# Altium PCB Trackpad.PcbDoc (part 3 of 3)
Units mm, origin at the board's own origin, x right, y up, seen from the top; angles counter-clockwise.
Board outline 170 x 125 mm, 6 copper layers (Top Layer, Inner 1, Inner 2, Inner 3, Inner 4, Bottom Layer), stack 1.58 mm thick; 124 components, 120 nets, 488 pads, 1566 vias.
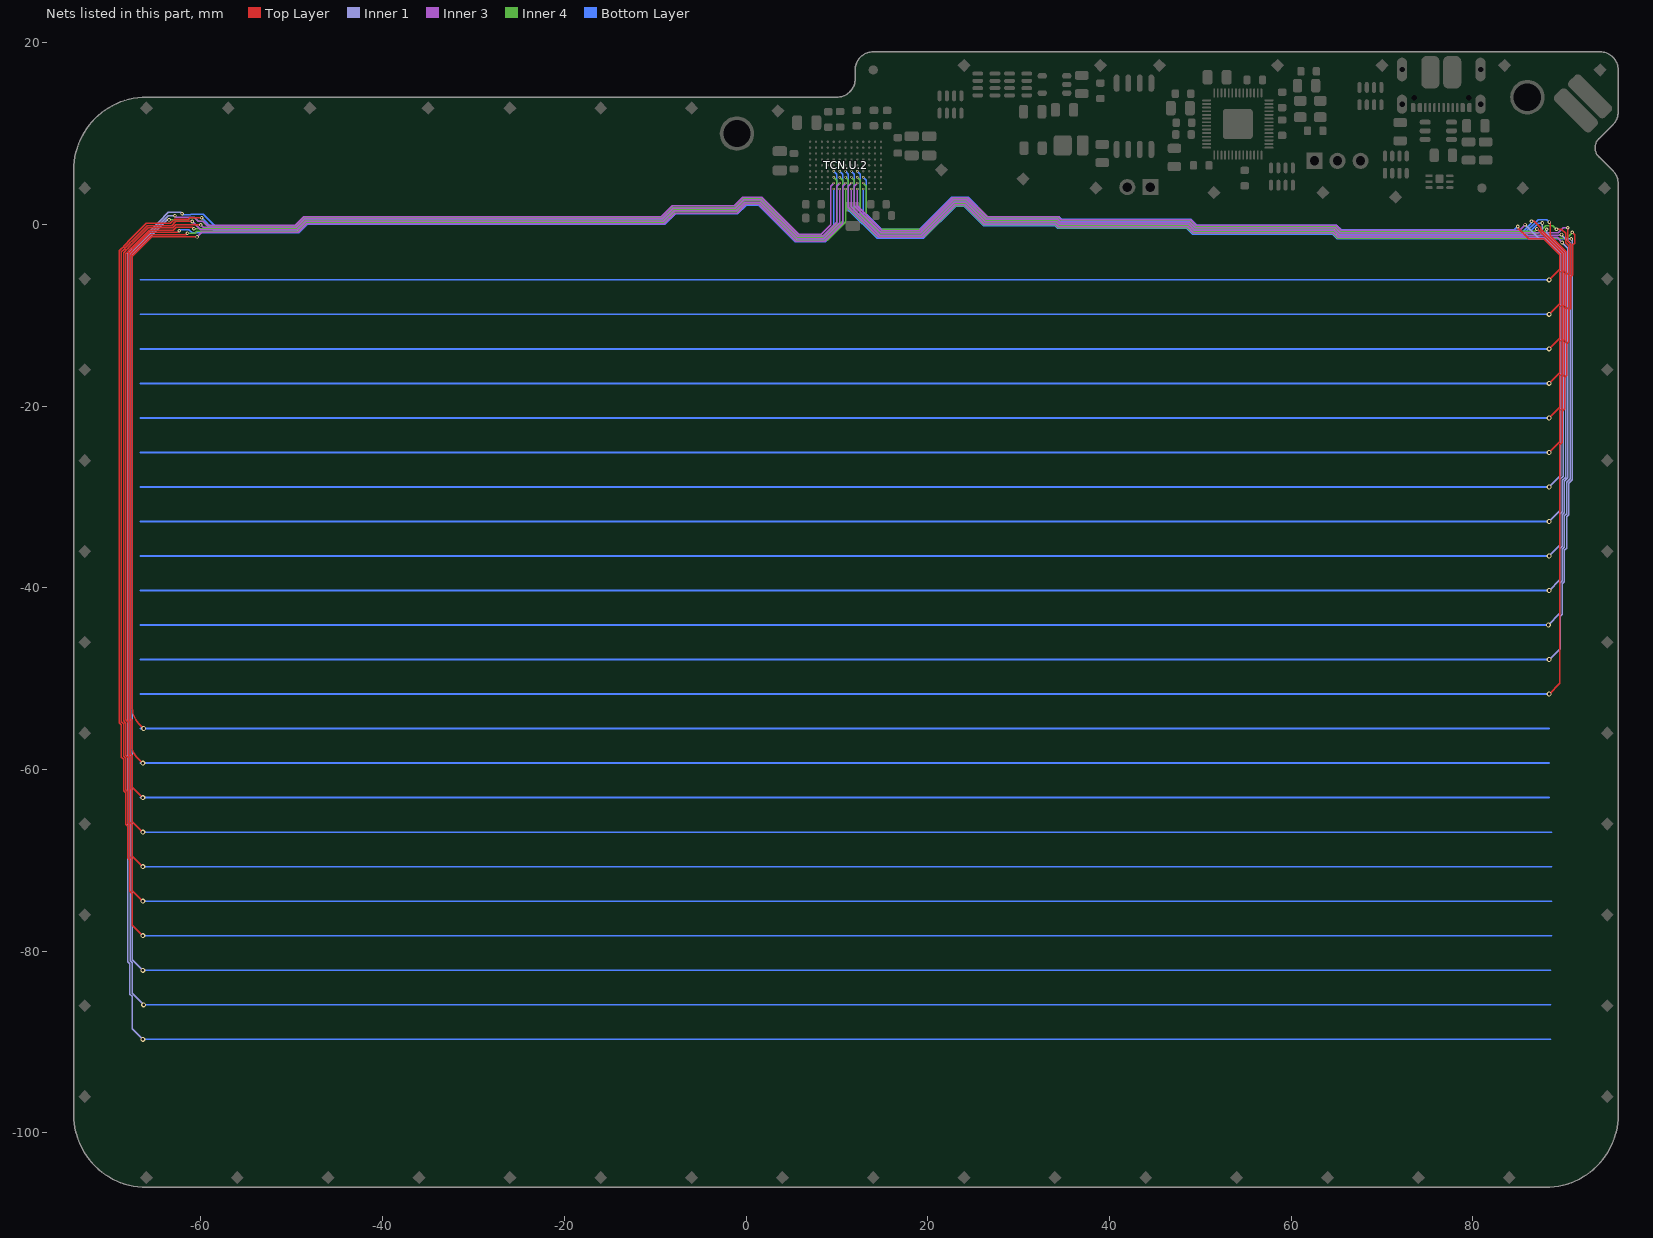
[diagram p7: the nets of this part, all layers, seen from the top]

## Via types
v1: diameter 0.8, hole 0.4, Top Layer to Bottom Layer, tented both sides, 1109 vias
v2: diameter 0.4, hole 0.2, Top Layer to Bottom Layer, tented both sides, 131 vias
v3: diameter 0.55, hole 0.3, Top Layer to Bottom Layer, tented both sides, 97 vias
v4: diameter 0.25, hole 0.15, Top Layer to Bottom Layer, tented both sides, 74 vias
v5: diameter 1.016, hole 0.508, Top Layer to Bottom Layer, tented both sides, 60 vias
v6: diameter 0.45, hole 0.3, Top Layer to Bottom Layer, tented both sides, 37 vias
v7: diameter 0.35, hole 0.2, Top Layer to Bottom Layer, tented both sides, 31 vias
v8: diameter 0.7, hole 0.4, Top Layer to Bottom Layer, tented both sides, 22 vias
v9: diameter 0.6, hole 0.3, Top Layer to Bottom Layer, tented both sides, 3 vias
v10: diameter 0.7, hole 0.3, Top Layer to Bottom Layer, tented both sides, 2 vias

## Nets (pads, with @x,y where several pads share a name; then routed paths per layer and width w, separated by ;. In a path a pad name is that pad's centre, name@x,y a point inside that pad or via, vN(x,y) a via of type N, cw(c..) or ccw(c..) an arc to the next point about the centre after c; other vN are vias at no path point) (continued)
Y3: TCN.U.2.A9 | length 358.9
  Inner 1 w0.15: v3(-66.4,-89.7) -67.575,-88.525 -67.575,-84.979 -67.825,-84.729 -67.825,-81.382 -68.05,-81.157 -68.05,-3.141 -64.609,0.3 -63.584,1.325 -62.225,1.325 v2(-62.075,1.175)
  Bottom Layer w0.15: v2(-62.075,1.175) -61.975,1.075 -61.15,1.075 -61.1,1.125 -59.75,1.125 -59.65,1.025 -58.2,-0.425 -49.475,-0.425 -48.537,0.513 -9.162,0.513 -7.988,1.687 -1.163,1.687 -0.212,2.638 1.587,2.638 5.65,-1.425 8.5,-1.425 9.65,-0.275 v4(9.65,3.9)
  Bottom Layer w0.2: v3@-66.5,-89.7 88.55,-89.7 ; -65.4,-89.7 -64.7,-89.7 ; -61.6,-89.7 -60.9,-89.7 ; -57.8,-89.7 -57.1,-89.7 ; -54,-89.7 -53.3,-89.7 ; -50.2,-89.7 -49.5,-89.7 ; -46.4,-89.7 -45.7,-89.7 ; -42.6,-89.7 -41.9,-89.7 ; -38.8,-89.7 -38.1,-89.7 ; -35,-89.7 -34.3,-89.7 ; -31.2,-89.7 -30.5,-89.7 ; -27.4,-89.7 -26.7,-89.7 ; -23.6,-89.7 -22.9,-89.7 ; -19.8,-89.7 -19.1,-89.7 ; -16,-89.7 -15.3,-89.7 ; -12.2,-89.7 -11.5,-89.7 ; -8.4,-89.7 -7.7,-89.7 ; -4.6,-89.7 -3.9,-89.7 ; -0.8,-89.7 -0.1,-89.7 ; 3,-89.7 3.7,-89.7 ; 6.8,-89.7 7.5,-89.7 ; 10.6,-89.7 11.3,-89.7 ; 14.4,-89.7 15.1,-89.7 ; 18.2,-89.7 18.9,-89.7 ; 22,-89.7 22.7,-89.7 ; 25.8,-89.7 26.5,-89.7 ; 29.6,-89.7 30.3,-89.7 ; 33.4,-89.7 34.1,-89.7 ; 37.2,-89.7 37.9,-89.7 ; 41,-89.7 41.7,-89.7 ; 44.8,-89.7 45.5,-89.7 ; 48.6,-89.7 49.3,-89.7 ; 52.4,-89.7 53.1,-89.7 ; 56.2,-89.7 56.9,-89.7 ; 60,-89.7 60.7,-89.7 ; 63.8,-89.7 64.5,-89.7 ; 67.6,-89.7 68.3,-89.7 ; 71.4,-89.7 72.1,-89.7 ; 75.2,-89.7 75.9,-89.7 ; 79,-89.7 79.7,-89.7 ; 82.8,-89.7 83.5,-89.7 ; 86.6,-89.7 87.3,-89.7
Y4: TCN.U.2.B9 | length 354.5
  Inner 3 w0.15: v2@-62.85,0.95 -62.7,0.8 -60.725,0.8 -60.275,0.35 -59.75,0.35 -59.4,0 ; -59.475,0.075 -59.329,-0.071 -49.621,-0.071 -48.684,0.866 -9.309,0.866 -8.135,2.04 -1.31,2.04 -0.359,2.991 1.734,2.991 5.8,-1.075 8.3,-1.075 9.325,-0.05 9.325,4.225 v4(9.65,4.55)
  Inner 1 w0.15: v3(-66.3,-85.9) -67.575,-84.625 -67.575,-81.279 -67.8,-81.054 -67.8,-3.245 -63.805,0.75 -63.605,0.95 v2(-62.875,0.95)
  Bottom Layer w0.2: v3@-66.5,-85.9 88.55,-85.9 ; -65.4,-85.9 -64.7,-85.9 ; -61.6,-85.9 -60.9,-85.9 ; -57.8,-85.9 -57.1,-85.9 ; -54,-85.9 -53.3,-85.9 ; -50.2,-85.9 -49.5,-85.9 ; -46.4,-85.9 -45.7,-85.9 ; -42.6,-85.9 -41.9,-85.9 ; -38.8,-85.9 -38.1,-85.9 ; -35,-85.9 -34.3,-85.9 ; -31.2,-85.9 -30.5,-85.9 ; -27.4,-85.9 -26.7,-85.9 ; -23.6,-85.9 -22.9,-85.9 ; -19.8,-85.9 -19.1,-85.9 ; -16,-85.9 -15.3,-85.9 ; -12.2,-85.9 -11.5,-85.9 ; -8.4,-85.9 -7.7,-85.9 ; -4.6,-85.9 -3.9,-85.9 ; -0.8,-85.9 -0.1,-85.9 ; 3,-85.9 3.7,-85.9 ; 6.8,-85.9 7.5,-85.9 ; 10.6,-85.9 11.3,-85.9 ; 14.4,-85.9 15.1,-85.9 ; 18.2,-85.9 18.9,-85.9 ; 22,-85.9 22.7,-85.9 ; 25.8,-85.9 26.5,-85.9 ; 29.6,-85.9 30.3,-85.9 ; 33.4,-85.9 34.1,-85.9 ; 37.2,-85.9 37.9,-85.9 ; 41,-85.9 41.7,-85.9 ; 44.8,-85.9 45.5,-85.9 ; 48.6,-85.9 49.3,-85.9 ; 52.4,-85.9 53.1,-85.9 ; 56.2,-85.9 56.9,-85.9 ; 60,-85.9 60.7,-85.9 ; 63.8,-85.9 64.5,-85.9 ; 67.6,-85.9 68.3,-85.9 ; 71.4,-85.9 72.1,-85.9 ; 75.2,-85.9 75.9,-85.9 ; 79,-85.9 79.7,-85.9 ; 82.8,-85.9 83.5,-85.9 ; 86.6,-85.9 87.3,-85.9
Y5: TCN.U.2.C9 | length 351.3
  Inner 4 w0.15: v2(-63.525,0.5) -61.375,0.5 -61.15,0.725 -60.7,0.725 -60.325,0.35 -59.8,0.35 -59.237,-0.213 -49.563,-0.213 -48.625,0.725 -9.25,0.725 -8.076,1.899 -1.251,1.899 -0.3,2.85 1.675,2.85 5.75,-1.225 8.7,-1.225 9.975,0.05 9.975,4.875 v4(9.65,5.2)
  Inner 1 w0.15: v3(-66.4,-82.1) -67.55,-80.95 -67.55,-3.348 -63.702,0.5 v2(-63.525,0.5)
  Bottom Layer w0.2: v3@-66.5,-82.1 88.55,-82.1 ; -65.4,-82.1 -64.7,-82.1 ; -61.6,-82.1 -60.9,-82.1 ; -57.8,-82.1 -57.1,-82.1 ; -54,-82.1 -53.3,-82.1 ; -50.2,-82.1 -49.5,-82.1 ; -46.4,-82.1 -45.7,-82.1 ; -42.6,-82.1 -41.9,-82.1 ; -38.8,-82.1 -38.1,-82.1 ; -35,-82.1 -34.3,-82.1 ; -31.2,-82.1 -30.5,-82.1 ; -27.4,-82.1 -26.7,-82.1 ; -23.6,-82.1 -22.9,-82.1 ; -19.8,-82.1 -19.1,-82.1 ; -16,-82.1 -15.3,-82.1 ; -12.2,-82.1 -11.5,-82.1 ; -8.4,-82.1 -7.7,-82.1 ; -4.6,-82.1 -3.9,-82.1 ; -0.8,-82.1 -0.1,-82.1 ; 3,-82.1 3.7,-82.1 ; 6.8,-82.1 7.5,-82.1 ; 10.6,-82.1 11.3,-82.1 ; 14.4,-82.1 15.1,-82.1 ; 18.2,-82.1 18.9,-82.1 ; 22,-82.1 22.7,-82.1 ; 25.8,-82.1 26.5,-82.1 ; 29.6,-82.1 30.3,-82.1 ; 33.4,-82.1 34.1,-82.1 ; 37.2,-82.1 37.9,-82.1 ; 41,-82.1 41.7,-82.1 ; 44.8,-82.1 45.5,-82.1 ; 48.6,-82.1 49.3,-82.1 ; 52.4,-82.1 53.1,-82.1 ; 56.2,-82.1 56.9,-82.1 ; 60,-82.1 60.7,-82.1 ; 63.8,-82.1 64.5,-82.1 ; 67.6,-82.1 68.3,-82.1 ; 71.4,-82.1 72.1,-82.1 ; 75.2,-82.1 75.9,-82.1 ; 79,-82.1 79.7,-82.1 ; 82.8,-82.1 83.5,-82.1 ; 86.6,-82.1 87.3,-82.1
Y6: TCN.U.2.D9 | length 351.1
  Top Layer w0.15: v3(-66.4,-78.3) -67.55,-77.15 -67.55,-73.689 -67.815,-73.424 -67.815,-69.964 -68.055,-69.724 -68.055,-66.263 -68.295,-66.023 -68.295,-62.563 -68.51,-62.348 -68.51,-58.887 -68.75,-58.647 -68.75,-55.086 -68.99,-54.846 -68.99,-53.865 -68.99,-2.929 -68.75,-2.689 -68.75,-2.674 -68.51,-2.434 -68.51,-2.42 -68.295,-2.205 -68.295,-2.191 -68.055,-1.951 -68.055,-1.937 -67.815,-1.697 -67.815,-1.683 -67.55,-1.418 -67.55,-1.404 -66.026,0.12 -63.355,0.12 -62.9,0.575 -61.4,0.575 -61.25,0.725 v2(-59.925,0.725)
  Bottom Layer w0.15: v2(-59.925,0.725) -58.528,-0.672 -49.372,-0.672 -48.435,0.265 -9.06,0.265 -7.886,1.439 -1.061,1.439 -0.11,2.39 1.485,2.39 5.55,-1.675 8.6,-1.675 9.975,-0.3 9.975,5.525 v4(9.65,5.85)
  Bottom Layer w0.2: v3(-66.4,-78.3) 88.65,-78.3 ; -65.4,-78.3 -64.7,-78.3 ; -61.6,-78.3 -60.9,-78.3 ; -57.8,-78.3 -57.1,-78.3 ; -54,-78.3 -53.3,-78.3 ; -50.2,-78.3 -49.5,-78.3 ; -46.4,-78.3 -45.7,-78.3 ; -42.6,-78.3 -41.9,-78.3 ; -38.8,-78.3 -38.1,-78.3 ; -35,-78.3 -34.3,-78.3 ; -31.2,-78.3 -30.5,-78.3 ; -27.4,-78.3 -26.7,-78.3 ; -23.6,-78.3 -22.9,-78.3 ; -19.8,-78.3 -19.1,-78.3 ; -16,-78.3 -15.3,-78.3 ; -12.2,-78.3 -11.5,-78.3 ; -8.4,-78.3 -7.7,-78.3 ; -4.6,-78.3 -3.9,-78.3 ; -0.8,-78.3 -0.1,-78.3 ; 3,-78.3 3.7,-78.3 ; 6.8,-78.3 7.5,-78.3 ; 10.6,-78.3 11.3,-78.3 ; 14.4,-78.3 15.1,-78.3 ; 18.2,-78.3 18.9,-78.3 ; 22,-78.3 22.7,-78.3 ; 25.8,-78.3 26.5,-78.3 ; 29.6,-78.3 30.3,-78.3 ; 33.4,-78.3 34.1,-78.3 ; 37.2,-78.3 37.9,-78.3 ; 41,-78.3 41.7,-78.3 ; 44.8,-78.3 45.5,-78.3 ; 48.6,-78.3 49.3,-78.3 ; 52.4,-78.3 53.1,-78.3 ; 56.2,-78.3 56.9,-78.3 ; 60,-78.3 60.7,-78.3 ; 63.8,-78.3 64.5,-78.3 ; 67.6,-78.3 68.3,-78.3 ; 71.4,-78.3 72.1,-78.3 ; 75.2,-78.3 75.9,-78.3 ; 79,-78.3 79.7,-78.3 ; 82.8,-78.3 83.5,-78.3 ; 86.6,-78.3 87.3,-78.3
Y7: TCN.U.2.A8 | length 344.5
  Top Layer w0.15: v3(-66.4,-74.5) -67.575,-73.325 -67.575,-69.864 -67.815,-69.624 -67.815,-66.164 -68.055,-65.924 -68.055,-62.463 -68.27,-62.248 -68.27,-58.788 -68.51,-58.548 -68.51,-54.987 -68.75,-54.747 -68.75,-53.766 -68.75,-3.028 -68.51,-2.788 -68.51,-2.774 -68.27,-2.534 -68.27,-2.52 -68.2,-2.45 -68.055,-2.305 -68.055,-2.291 -67.815,-2.051 -67.815,-2.036 -67.575,-1.796 -67.575,-1.782 -65.923,-0.13 -63.23,-0.13 -62.775,0.325 v2(-60.95,0.325)
  Inner 3 w0.15: v2(-60.95,0.325) -60.023,-0.602 -49.402,-0.602 -48.464,0.336 -9.089,0.336 -7.915,1.51 -1.09,1.51 -0.139,2.461 1.514,2.461 5.575,-1.6 8.525,-1.6 10.3,0.175 v4(10.3,3.9)
  Bottom Layer w0.2: v3(-66.4,-74.5) 88.65,-74.5 ; -65.4,-74.5 -64.7,-74.5 ; -61.6,-74.5 -60.9,-74.5 ; -57.8,-74.5 -57.1,-74.5 ; -54,-74.5 -53.3,-74.5 ; -50.2,-74.5 -49.5,-74.5 ; -46.4,-74.5 -45.7,-74.5 ; -42.6,-74.5 -41.9,-74.5 ; -38.8,-74.5 -38.1,-74.5 ; -35,-74.5 -34.3,-74.5 ; -31.2,-74.5 -30.5,-74.5 ; -27.4,-74.5 -26.7,-74.5 ; -23.6,-74.5 -22.9,-74.5 ; -19.8,-74.5 -19.1,-74.5 ; -16,-74.5 -15.3,-74.5 ; -12.2,-74.5 -11.5,-74.5 ; -8.4,-74.5 -7.7,-74.5 ; -4.6,-74.5 -3.9,-74.5 ; -0.8,-74.5 -0.1,-74.5 ; 3,-74.5 3.7,-74.5 ; 6.8,-74.5 7.5,-74.5 ; 10.6,-74.5 11.3,-74.5 ; 14.4,-74.5 15.1,-74.5 ; 18.2,-74.5 18.9,-74.5 ; 22,-74.5 22.7,-74.5 ; 25.8,-74.5 26.5,-74.5 ; 29.6,-74.5 30.3,-74.5 ; 33.4,-74.5 34.1,-74.5 ; 37.2,-74.5 37.9,-74.5 ; 41,-74.5 41.7,-74.5 ; 44.8,-74.5 45.5,-74.5 ; 48.6,-74.5 49.3,-74.5 ; 52.4,-74.5 53.1,-74.5 ; 56.2,-74.5 56.9,-74.5 ; 60,-74.5 60.7,-74.5 ; 63.8,-74.5 64.5,-74.5 ; 67.6,-74.5 68.3,-74.5 ; 71.4,-74.5 72.1,-74.5 ; 75.2,-74.5 75.9,-74.5 ; 79,-74.5 79.7,-74.5 ; 82.8,-74.5 83.5,-74.5 ; 86.6,-74.5 87.3,-74.5
Y8: TCN.U.2.B8 | length 340.2
  Top Layer w0.15: v3(-66.4,-70.7) -67.575,-69.525 -67.575,-66.064 -67.815,-65.824 -67.815,-62.364 -68.03,-62.149 -68.03,-58.688 -68.27,-58.448 -68.27,-54.888 -68.51,-54.648 -68.51,-53.666 -68.51,-3.127 -68.27,-2.887 -68.27,-2.873 -68.03,-2.633 -68.03,-2.619 -68,-2.589 -67.815,-2.404 -67.815,-2.39 -67.575,-2.15 -67.575,-2.136 -65.819,-0.38 -63.13,-0.38 -62.8,-0.05 v2(-60.025,-0.05)
  Inner 3 w0.15: v2(-60.025,-0.05) -59.738,-0.337 -49.512,-0.337 -48.574,0.601 -9.199,0.601 -8.025,1.775 -1.2,1.775 -0.249,2.726 1.624,2.726 5.675,-1.325 8.425,-1.325 9.975,0.225 9.975,4.225 v4(10.3,4.55)
  Bottom Layer w0.2: v3(-66.4,-70.7) 88.65,-70.7 ; -65.4,-70.7 -64.7,-70.7 ; -61.6,-70.7 -60.9,-70.7 ; -57.8,-70.7 -57.1,-70.7 ; -54,-70.7 -53.3,-70.7 ; -50.2,-70.7 -49.5,-70.7 ; -46.4,-70.7 -45.7,-70.7 ; -42.6,-70.7 -41.9,-70.7 ; -38.8,-70.7 -38.1,-70.7 ; -35,-70.7 -34.3,-70.7 ; -31.2,-70.7 -30.5,-70.7 ; -27.4,-70.7 -26.7,-70.7 ; -23.6,-70.7 -22.9,-70.7 ; -19.8,-70.7 -19.1,-70.7 ; -16,-70.7 -15.3,-70.7 ; -12.2,-70.7 -11.5,-70.7 ; -8.4,-70.7 -7.7,-70.7 ; -4.6,-70.7 -3.9,-70.7 ; -0.8,-70.7 -0.1,-70.7 ; 3,-70.7 3.7,-70.7 ; 6.8,-70.7 7.5,-70.7 ; 10.6,-70.7 11.3,-70.7 ; 14.4,-70.7 15.1,-70.7 ; 18.2,-70.7 18.9,-70.7 ; 22,-70.7 22.7,-70.7 ; 25.8,-70.7 26.5,-70.7 ; 29.6,-70.7 30.3,-70.7 ; 33.4,-70.7 34.1,-70.7 ; 37.2,-70.7 37.9,-70.7 ; 41,-70.7 41.7,-70.7 ; 44.8,-70.7 45.5,-70.7 ; 48.6,-70.7 49.3,-70.7 ; 52.4,-70.7 53.1,-70.7 ; 56.2,-70.7 56.9,-70.7 ; 60,-70.7 60.7,-70.7 ; 63.8,-70.7 64.5,-70.7 ; 67.6,-70.7 68.3,-70.7 ; 71.4,-70.7 72.1,-70.7 ; 75.2,-70.7 75.9,-70.7 ; 79,-70.7 79.7,-70.7 ; 82.8,-70.7 83.5,-70.7 ; 86.6,-70.7 87.3,-70.7
Y9: TCN.U.2.C8 | length 337.1
  Top Layer w0.15: v3(-66.4,-66.9) -67.575,-65.725 -67.575,-62.264 -67.79,-62.049 -67.79,-58.589 -68.03,-58.349 -68.03,-54.788 -68.27,-54.548 -68.27,-53.567 -68.27,-3.227 -68.03,-2.987 -68.03,-2.973 -67.79,-2.733 -67.79,-2.718 -67.775,-2.703 -67.575,-2.503 -67.575,-2.489 -65.716,-0.63 -63.03,-0.63 -62.7,-0.3 -60.95,-0.3 v2(-60.775,-0.475)
  Inner 4 w0.15: v2(-60.775,-0.475) -60.772,-0.478 -49.453,-0.478 -48.515,0.46 -9.14,0.46 -7.966,1.634 -1.141,1.634 -0.19,2.585 1.565,2.585 5.625,-1.475 8.825,-1.475 10.625,0.325 10.625,4.875 v4(10.3,5.2)
  Bottom Layer w0.2: v3(-66.4,-66.9) 88.65,-66.9 ; -65.4,-66.9 -64.7,-66.9 ; -61.6,-66.9 -60.9,-66.9 ; -57.8,-66.9 -57.1,-66.9 ; -54,-66.9 -53.3,-66.9 ; -50.2,-66.9 -49.5,-66.9 ; -46.4,-66.9 -45.7,-66.9 ; -42.6,-66.9 -41.9,-66.9 ; -38.8,-66.9 -38.1,-66.9 ; -35,-66.9 -34.3,-66.9 ; -31.2,-66.9 -30.5,-66.9 ; -27.4,-66.9 -26.7,-66.9 ; -23.6,-66.9 -22.9,-66.9 ; -19.8,-66.9 -19.1,-66.9 ; -16,-66.9 -15.3,-66.9 ; -12.2,-66.9 -11.5,-66.9 ; -8.4,-66.9 -7.7,-66.9 ; -4.6,-66.9 -3.9,-66.9 ; -0.8,-66.9 -0.1,-66.9 ; 3,-66.9 3.7,-66.9 ; 6.8,-66.9 7.5,-66.9 ; 10.6,-66.9 11.3,-66.9 ; 14.4,-66.9 15.1,-66.9 ; 18.2,-66.9 18.9,-66.9 ; 22,-66.9 22.7,-66.9 ; 25.8,-66.9 26.5,-66.9 ; 29.6,-66.9 30.3,-66.9 ; 33.4,-66.9 34.1,-66.9 ; 37.2,-66.9 37.9,-66.9 ; 41,-66.9 41.7,-66.9 ; 44.8,-66.9 45.5,-66.9 ; 48.6,-66.9 49.3,-66.9 ; 52.4,-66.9 53.1,-66.9 ; 56.2,-66.9 56.9,-66.9 ; 60,-66.9 60.7,-66.9 ; 63.8,-66.9 64.5,-66.9 ; 67.6,-66.9 68.3,-66.9 ; 71.4,-66.9 72.1,-66.9 ; 75.2,-66.9 75.9,-66.9 ; 79,-66.9 79.7,-66.9 ; 82.8,-66.9 83.5,-66.9 ; 86.6,-66.9 87.3,-66.9
Y10: TCN.U.2.D8 | length 333.9
  Top Layer w0.15: v3(-66.4,-63.1) -67.55,-61.95 -67.55,-58.489 -67.79,-58.249 -67.79,-54.689 -68.03,-54.449 -68.03,-53.467 -68.03,-3.326 -67.79,-3.086 -67.79,-3.072 -67.55,-2.832 -67.55,-2.818 -65.612,-0.88 -62.58,-0.88 v2(-62.4,-0.7)
  Bottom Layer w0.15: v2(-62.4,-0.7) -62.3,-0.6 -61.325,-0.6 -60.987,-0.938 -49.263,-0.938 -48.325,0 -8.95,0 -7.776,1.174 -0.951,1.174 0,2.125 1.375,2.125 5.425,-1.925 8.7,-1.925 10.625,0 10.625,5.525 v4(10.3,5.85)
  Bottom Layer w0.2: v3@-66.65,-63.1 88.4,-63.1 ; -65.4,-63.1 -64.7,-63.1 ; -61.6,-63.1 -60.9,-63.1 ; -57.8,-63.1 -57.1,-63.1 ; -54,-63.1 -53.3,-63.1 ; -50.2,-63.1 -49.5,-63.1 ; -46.4,-63.1 -45.7,-63.1 ; -42.6,-63.1 -41.9,-63.1 ; -38.8,-63.1 -38.1,-63.1 ; -35,-63.1 -34.3,-63.1 ; -31.2,-63.1 -30.5,-63.1 ; -27.4,-63.1 -26.7,-63.1 ; -23.6,-63.1 -22.9,-63.1 ; -19.8,-63.1 -19.1,-63.1 ; -16,-63.1 -15.3,-63.1 ; -12.2,-63.1 -11.5,-63.1 ; -8.4,-63.1 -7.7,-63.1 ; -4.6,-63.1 -3.9,-63.1 ; -0.8,-63.1 -0.1,-63.1 ; 3,-63.1 3.7,-63.1 ; 6.8,-63.1 7.5,-63.1 ; 10.6,-63.1 11.3,-63.1 ; 14.4,-63.1 15.1,-63.1 ; 18.2,-63.1 18.9,-63.1 ; 22,-63.1 22.7,-63.1 ; 25.8,-63.1 26.5,-63.1 ; 29.6,-63.1 30.3,-63.1 ; 33.4,-63.1 34.1,-63.1 ; 37.2,-63.1 37.9,-63.1 ; 41,-63.1 41.7,-63.1 ; 44.8,-63.1 45.5,-63.1 ; 48.6,-63.1 49.3,-63.1 ; 52.4,-63.1 53.1,-63.1 ; 56.2,-63.1 56.9,-63.1 ; 60,-63.1 60.7,-63.1 ; 63.8,-63.1 64.5,-63.1 ; 67.6,-63.1 68.3,-63.1 ; 71.4,-63.1 72.1,-63.1 ; 75.2,-63.1 75.9,-63.1 ; 79,-63.1 79.7,-63.1 ; 82.8,-63.1 83.5,-63.1 ; 86.6,-63.1 87.3,-63.1
Y11: TCN.U.2.A7 | length 327.4
  Top Layer w0.15: v3(-66.4,-59.3) -67.106,-58.594 cw(c-66.034,-57.522) -67.55,-57.522 -67.55,-54.589 -67.79,-54.349 -67.79,-53.368 -67.79,-3.426 -67.55,-3.186 -67.55,-3.171 -65.508,-1.13 -61.655,-1.13 v2(-61.5,-0.975)
  Inner 4 w0.15: v2(-61.5,-0.975) -60.7,-0.975 -60.468,-0.743 -49.343,-0.743 -48.406,0.194 -9.031,0.194 -7.857,1.368 -1.032,1.368 -0.081,2.319 1.456,2.319 5.5,-1.725 8.95,-1.725 10.95,0.275 v4(10.95,3.9)
  Bottom Layer w0.2: v3@-66.65,-59.3 88.4,-59.3 ; -65.4,-59.3 -64.7,-59.3 ; -61.6,-59.3 -60.9,-59.3 ; -57.8,-59.3 -57.1,-59.3 ; -54,-59.3 -53.3,-59.3 ; -50.2,-59.3 -49.5,-59.3 ; -46.4,-59.3 -45.7,-59.3 ; -42.6,-59.3 -41.9,-59.3 ; -38.8,-59.3 -38.1,-59.3 ; -35,-59.3 -34.3,-59.3 ; -31.2,-59.3 -30.5,-59.3 ; -27.4,-59.3 -26.7,-59.3 ; -23.6,-59.3 -22.9,-59.3 ; -19.8,-59.3 -19.1,-59.3 ; -16,-59.3 -15.3,-59.3 ; -12.2,-59.3 -11.5,-59.3 ; -8.4,-59.3 -7.7,-59.3 ; -4.6,-59.3 -3.9,-59.3 ; -0.8,-59.3 -0.1,-59.3 ; 3,-59.3 3.7,-59.3 ; 6.8,-59.3 7.5,-59.3 ; 10.6,-59.3 11.3,-59.3 ; 14.4,-59.3 15.1,-59.3 ; 18.2,-59.3 18.9,-59.3 ; 22,-59.3 22.7,-59.3 ; 25.8,-59.3 26.5,-59.3 ; 29.6,-59.3 30.3,-59.3 ; 33.4,-59.3 34.1,-59.3 ; 37.2,-59.3 37.9,-59.3 ; 41,-59.3 41.7,-59.3 ; 44.8,-59.3 45.5,-59.3 ; 48.6,-59.3 49.3,-59.3 ; 52.4,-59.3 53.1,-59.3 ; 56.2,-59.3 56.9,-59.3 ; 60,-59.3 60.7,-59.3 ; 63.8,-59.3 64.5,-59.3 ; 67.6,-59.3 68.3,-59.3 ; 71.4,-59.3 72.1,-59.3 ; 75.2,-59.3 75.9,-59.3 ; 79,-59.3 79.7,-59.3 ; 82.8,-59.3 83.5,-59.3 ; 86.6,-59.3 87.3,-59.3
Y12: TCN.U.2.B7 | length 323.7
  Top Layer w0.15: v3(-66.3,-55.5) -66.856,-54.944 cw(c-65.181,-53.269) -67.55,-53.269 -67.55,-3.525 -65.405,-1.38 -60.43,-1.38 v2(-60.425,-1.375)
  Inner 3 w0.15: v2(-60.425,-1.375) -59.917,-0.867 -49.292,-0.867 -48.354,0.071 -8.979,0.071 -7.805,1.245 -0.98,1.245 -0.029,2.196 1.404,2.196 5.45,-1.85 8.65,-1.85 10.625,0.125 10.625,4.225 v4(10.95,4.55)
  Bottom Layer w0.2: -66.65,-55.5 88.4,-55.5 ; -65.4,-55.5 -64.7,-55.5 ; -61.6,-55.5 -60.9,-55.5 ; -57.8,-55.5 -57.1,-55.5 ; -54,-55.5 -53.3,-55.5 ; -50.2,-55.5 -49.5,-55.5 ; -46.4,-55.5 -45.7,-55.5 ; -42.6,-55.5 -41.9,-55.5 ; -38.8,-55.5 -38.1,-55.5 ; -35,-55.5 -34.3,-55.5 ; -31.2,-55.5 -30.5,-55.5 ; -27.4,-55.5 -26.7,-55.5 ; -23.6,-55.5 -22.9,-55.5 ; -19.8,-55.5 -19.1,-55.5 ; -16,-55.5 -15.3,-55.5 ; -12.2,-55.5 -11.5,-55.5 ; -8.4,-55.5 -7.7,-55.5 ; -4.6,-55.5 -3.9,-55.5 ; -0.8,-55.5 -0.1,-55.5 ; 3,-55.5 3.7,-55.5 ; 6.8,-55.5 7.5,-55.5 ; 10.6,-55.5 11.3,-55.5 ; 14.4,-55.5 15.1,-55.5 ; 18.2,-55.5 18.9,-55.5 ; 22,-55.5 22.7,-55.5 ; 25.8,-55.5 26.5,-55.5 ; 29.6,-55.5 30.3,-55.5 ; 33.4,-55.5 34.1,-55.5 ; 37.2,-55.5 37.9,-55.5 ; 41,-55.5 41.7,-55.5 ; 44.8,-55.5 45.5,-55.5 ; 48.6,-55.5 49.3,-55.5 ; 52.4,-55.5 53.1,-55.5 ; 56.2,-55.5 56.9,-55.5 ; 60,-55.5 60.7,-55.5 ; 63.8,-55.5 64.5,-55.5 ; 67.6,-55.5 68.3,-55.5 ; 71.4,-55.5 72.1,-55.5 ; 75.2,-55.5 75.9,-55.5 ; 79,-55.5 79.7,-55.5 ; 82.8,-55.5 83.5,-55.5 ; 86.6,-55.5 87.3,-55.5
Y13: TCN.U.2.C7 | length 323.5
  Top Layer w0.15: v3(88.4,-51.7) 89.575,-50.525 89.575,-24.275 89.85,-24 89.85,-20.55 90.1,-20.3 90.1,-16.825 90.325,-16.6 90.325,-13.15 90.55,-12.925 90.55,-9.45 90.775,-9.225 90.775,-5.775 91.015,-5.535 91.015,-2.26 91.2,-2.075 91.2,-1.125 v2(90.95,-0.875)
  Inner 4 w0.15: v4(10.95,5.2) 11.275,4.875 11.275,1.8 14.375,-1.3 19.675,-1.3 23.046,2.071 24.054,2.071 26.188,-0.063 34.038,-0.063 34.338,-0.363 48.563,-0.363 49.2,-1 64.6,-1 65.127,-1.527 90.348,-1.527 90.95,-0.925 v2(90.95,-0.875)
  Bottom Layer w0.2: -66.65,-51.7 v3(88.4,-51.7) ; -65.4,-51.7 -64.7,-51.7 ; -61.6,-51.7 -60.9,-51.7 ; -57.8,-51.7 -57.1,-51.7 ; -54,-51.7 -53.3,-51.7 ; -50.2,-51.7 -49.5,-51.7 ; -46.4,-51.7 -45.7,-51.7 ; -42.6,-51.7 -41.9,-51.7 ; -38.8,-51.7 -38.1,-51.7 ; -35,-51.7 -34.3,-51.7 ; -31.2,-51.7 -30.5,-51.7 ; -27.4,-51.7 -26.7,-51.7 ; -23.6,-51.7 -22.9,-51.7 ; -19.8,-51.7 -19.1,-51.7 ; -16,-51.7 -15.3,-51.7 ; -12.2,-51.7 -11.5,-51.7 ; -8.4,-51.7 -7.7,-51.7 ; -4.6,-51.7 -3.9,-51.7 ; -0.8,-51.7 -0.1,-51.7 ; 3,-51.7 3.7,-51.7 ; 6.8,-51.7 7.5,-51.7 ; 10.6,-51.7 11.3,-51.7 ; 14.4,-51.7 15.1,-51.7 ; 18.2,-51.7 18.9,-51.7 ; 22,-51.7 22.7,-51.7 ; 25.8,-51.7 26.5,-51.7 ; 29.6,-51.7 30.3,-51.7 ; 33.4,-51.7 34.1,-51.7 ; 37.2,-51.7 37.9,-51.7 ; 41,-51.7 41.7,-51.7 ; 44.8,-51.7 45.5,-51.7 ; 48.6,-51.7 49.3,-51.7 ; 52.4,-51.7 53.1,-51.7 ; 56.2,-51.7 56.9,-51.7 ; 60,-51.7 60.7,-51.7 ; 63.8,-51.7 64.5,-51.7 ; 67.6,-51.7 68.3,-51.7 ; 71.4,-51.7 72.1,-51.7 ; 75.2,-51.7 75.9,-51.7 ; 79,-51.7 79.7,-51.7 ; 82.8,-51.7 83.5,-51.7 ; 86.6,-51.7 87.3,-51.7
Y14: TCN.U.2.D7 | length 319.4
  Inner 1 w0.15: v3(88.4,-47.9) 89.6,-46.7 89.6,-43.154 89.825,-42.929 89.825,-39.582 90.075,-39.332 90.075,-35.886 90.325,-35.636 90.325,-32.189 90.575,-31.939 90.575,-28.493 90.95,-28.118 90.95,-2.957 90.95,-1.725 v2(90.825,-1.6)
  Bottom Layer w0.15: v4(10.95,5.85) 11.275,5.525 11.275,1.6 14.425,-1.55 19.525,-1.55 23.075,2 24.025,2 26.159,-0.134 34.009,-0.134 34.309,-0.434 48.534,-0.434 49.171,-1.071 64.571,-1.071 65.1,-1.6 v2(90.825,-1.6)
  Bottom Layer w0.2: -66.65,-47.9 v3(88.4,-47.9) ; -65.4,-47.9 -64.7,-47.9 ; -61.6,-47.9 -60.9,-47.9 ; -57.8,-47.9 -57.1,-47.9 ; -54,-47.9 -53.3,-47.9 ; -50.2,-47.9 -49.5,-47.9 ; -46.4,-47.9 -45.7,-47.9 ; -42.6,-47.9 -41.9,-47.9 ; -38.8,-47.9 -38.1,-47.9 ; -35,-47.9 -34.3,-47.9 ; -31.2,-47.9 -30.5,-47.9 ; -27.4,-47.9 -26.7,-47.9 ; -23.6,-47.9 -22.9,-47.9 ; -19.8,-47.9 -19.1,-47.9 ; -16,-47.9 -15.3,-47.9 ; -12.2,-47.9 -11.5,-47.9 ; -8.4,-47.9 -7.7,-47.9 ; -4.6,-47.9 -3.9,-47.9 ; -0.8,-47.9 -0.1,-47.9 ; 3,-47.9 3.7,-47.9 ; 6.8,-47.9 7.5,-47.9 ; 10.6,-47.9 11.3,-47.9 ; 14.4,-47.9 15.1,-47.9 ; 18.2,-47.9 18.9,-47.9 ; 22,-47.9 22.7,-47.9 ; 25.8,-47.9 26.5,-47.9 ; 29.6,-47.9 30.3,-47.9 ; 33.4,-47.9 34.1,-47.9 ; 37.2,-47.9 37.9,-47.9 ; 41,-47.9 41.7,-47.9 ; 44.8,-47.9 45.5,-47.9 ; 48.6,-47.9 49.3,-47.9 ; 52.4,-47.9 53.1,-47.9 ; 56.2,-47.9 56.9,-47.9 ; 60,-47.9 60.7,-47.9 ; 63.8,-47.9 64.5,-47.9 ; 67.6,-47.9 68.3,-47.9 ; 71.4,-47.9 72.1,-47.9 ; 75.2,-47.9 75.9,-47.9 ; 79,-47.9 79.7,-47.9 ; 82.8,-47.9 83.5,-47.9 ; 86.6,-47.9 87.3,-47.9
Y15: TCN.U.2.A6 | length 312.5
  Inner 3 w0.15: v4(11.6,3.9) 11.6,1.95 14.725,-1.175 19.3,-1.175 22.899,2.424 24.201,2.424 26.335,0.29 34.185,0.29 34.485,-0.01 48.71,-0.01 49.346,-0.646 64.746,-0.646 65.273,-1.173 89.702,-1.173 v2(89.75,-1.125)
  Inner 1 w0.15: v3(88.3,-44.1) 89.575,-42.825 89.575,-39.479 89.825,-39.229 89.825,-35.782 90.075,-35.532 90.075,-32.086 90.325,-31.836 90.325,-28.389 90.7,-28.014 90.7,-3.061 90.7,-2.075 v2(89.75,-1.125)
  Bottom Layer w0.2: -66.65,-44.1 v3@88.4,-44.1 ; -65.4,-44.1 -64.7,-44.1 ; -61.6,-44.1 -60.9,-44.1 ; -57.8,-44.1 -57.1,-44.1 ; -54,-44.1 -53.3,-44.1 ; -50.2,-44.1 -49.5,-44.1 ; -46.4,-44.1 -45.7,-44.1 ; -42.6,-44.1 -41.9,-44.1 ; -38.8,-44.1 -38.1,-44.1 ; -35,-44.1 -34.3,-44.1 ; -31.2,-44.1 -30.5,-44.1 ; -27.4,-44.1 -26.7,-44.1 ; -23.6,-44.1 -22.9,-44.1 ; -19.8,-44.1 -19.1,-44.1 ; -16,-44.1 -15.3,-44.1 ; -12.2,-44.1 -11.5,-44.1 ; -8.4,-44.1 -7.7,-44.1 ; -4.6,-44.1 -3.9,-44.1 ; -0.8,-44.1 -0.1,-44.1 ; 3,-44.1 3.7,-44.1 ; 6.8,-44.1 7.5,-44.1 ; 10.6,-44.1 11.3,-44.1 ; 14.4,-44.1 15.1,-44.1 ; 18.2,-44.1 18.9,-44.1 ; 22,-44.1 22.7,-44.1 ; 25.8,-44.1 26.5,-44.1 ; 29.6,-44.1 30.3,-44.1 ; 33.4,-44.1 34.1,-44.1 ; 37.2,-44.1 37.9,-44.1 ; 41,-44.1 41.7,-44.1 ; 44.8,-44.1 45.5,-44.1 ; 48.6,-44.1 49.3,-44.1 ; 52.4,-44.1 53.1,-44.1 ; 56.2,-44.1 56.9,-44.1 ; 60,-44.1 60.7,-44.1 ; 63.8,-44.1 64.5,-44.1 ; 67.6,-44.1 68.3,-44.1 ; 71.4,-44.1 72.1,-44.1 ; 75.2,-44.1 75.9,-44.1 ; 79,-44.1 79.7,-44.1 ; 82.8,-44.1 83.5,-44.1 ; 86.6,-44.1 87.3,-44.1
Y16: TCN.U.2.B6 | length 309.1
  Inner 3 w0.15: v4(11.6,4.55) 11.275,4.225 11.275,1.9 14.6,-1.425 19.425,-1.425 23.009,2.159 24.091,2.159 26.225,0.025 34.075,0.025 34.375,-0.275 48.6,-0.275 49.237,-0.912 64.637,-0.912 65.163,-1.438 89.263,-1.438 v2(89.825,-2)
  Inner 1 w0.15: v3(88.4,-40.3) 89.575,-39.125 89.575,-35.679 89.825,-35.429 89.825,-31.982 90.075,-31.732 90.075,-28.286 90.45,-27.911 90.45,-3.164 90.45,-2.625 v2(89.825,-2)
  Bottom Layer w0.2: -66.65,-40.3 v3(88.4,-40.3) ; -65.4,-40.3 -64.7,-40.3 ; -61.6,-40.3 -60.9,-40.3 ; -57.8,-40.3 -57.1,-40.3 ; -54,-40.3 -53.3,-40.3 ; -50.2,-40.3 -49.5,-40.3 ; -46.4,-40.3 -45.7,-40.3 ; -42.6,-40.3 -41.9,-40.3 ; -38.8,-40.3 -38.1,-40.3 ; -35,-40.3 -34.3,-40.3 ; -31.2,-40.3 -30.5,-40.3 ; -27.4,-40.3 -26.7,-40.3 ; -23.6,-40.3 -22.9,-40.3 ; -19.8,-40.3 -19.1,-40.3 ; -16,-40.3 -15.3,-40.3 ; -12.2,-40.3 -11.5,-40.3 ; -8.4,-40.3 -7.7,-40.3 ; -4.6,-40.3 -3.9,-40.3 ; -0.8,-40.3 -0.1,-40.3 ; 3,-40.3 3.7,-40.3 ; 6.8,-40.3 7.5,-40.3 ; 10.6,-40.3 11.3,-40.3 ; 14.4,-40.3 15.1,-40.3 ; 18.2,-40.3 18.9,-40.3 ; 22,-40.3 22.7,-40.3 ; 25.8,-40.3 26.5,-40.3 ; 29.6,-40.3 30.3,-40.3 ; 33.4,-40.3 34.1,-40.3 ; 37.2,-40.3 37.9,-40.3 ; 41,-40.3 41.7,-40.3 ; 44.8,-40.3 45.5,-40.3 ; 48.6,-40.3 49.3,-40.3 ; 52.4,-40.3 53.1,-40.3 ; 56.2,-40.3 56.9,-40.3 ; 60,-40.3 60.7,-40.3 ; 63.8,-40.3 64.5,-40.3 ; 67.6,-40.3 68.3,-40.3 ; 71.4,-40.3 72.1,-40.3 ; 75.2,-40.3 75.9,-40.3 ; 79,-40.3 79.7,-40.3 ; 82.8,-40.3 83.5,-40.3 ; 86.6,-40.3 87.3,-40.3
Y17: TCN.U.2.C6 | length 334.3
  Inner 4 w0.15: v4(11.6,5.2) 11.925,4.875 11.925,1.525 14.5,-1.05 19.55,-1.05 22.936,2.336 24.164,2.336 26.298,0.202 34.148,0.202 34.448,-0.098 48.673,-0.098 49.31,-0.735 64.71,-0.735 65.237,-1.262 87.388,-1.262 v2(88.125,-0.525)
  Inner 1 w0.15: v2(88.125,-0.525) 88.125,-0.975 90.2,-3.05 90.2,-27.807 89.825,-28.182 89.825,-31.629 89.575,-31.879 89.575,-35.325 v3(88.4,-36.5)
  Bottom Layer w0.2: -66.65,-36.5 v3(88.4,-36.5) ; 6.8,-36.5 7.5,-36.5 ; 6.8,-36.5 7.5,-36.5 ; 60,-36.5 60.7,-36.5 60,-36.5 ; -65.4,-36.5 -64.7,-36.5 -65.4,-36.5 ; -61.6,-36.5 -60.9,-36.5 -61.6,-36.5 ; -57.8,-36.5 -57.1,-36.5 -57.8,-36.5 ; -54,-36.5 -53.3,-36.5 -54,-36.5 ; -50.2,-36.5 -49.5,-36.5 -50.2,-36.5 ; -46.4,-36.5 -45.7,-36.5 -46.4,-36.5 ; -42.6,-36.5 -41.9,-36.5 -42.6,-36.5 ; -38.8,-36.5 -38.1,-36.5 -38.8,-36.5 ; -35,-36.5 -34.3,-36.5 -35,-36.5 ; -31.2,-36.5 -30.5,-36.5 -31.2,-36.5 ; -27.4,-36.5 -26.7,-36.5 -27.4,-36.5 ; -23.6,-36.5 -22.9,-36.5 -23.6,-36.5 ; -19.8,-36.5 -19.1,-36.5 -19.8,-36.5 ; -16,-36.5 -15.3,-36.5 -16,-36.5 ; -12.2,-36.5 -11.5,-36.5 -12.2,-36.5 ; -8.4,-36.5 -7.7,-36.5 -8.4,-36.5 ; -4.6,-36.5 -3.9,-36.5 -4.6,-36.5 ; -0.8,-36.5 -0.1,-36.5 -0.8,-36.5 ; 3,-36.5 3.7,-36.5 3,-36.5 ; 10.6,-36.5 11.3,-36.5 10.6,-36.5 ; 14.4,-36.5 15.1,-36.5 14.4,-36.5 ; 18.2,-36.5 18.9,-36.5 18.2,-36.5 ; 22,-36.5 22.7,-36.5 22,-36.5 ; 25.8,-36.5 26.5,-36.5 25.8,-36.5 ; 29.6,-36.5 30.3,-36.5 29.6,-36.5 ; 33.4,-36.5 34.1,-36.5 33.4,-36.5 ; 37.2,-36.5 37.9,-36.5 37.2,-36.5 ; 41,-36.5 41.7,-36.5 41,-36.5 ; 44.8,-36.5 45.5,-36.5 44.8,-36.5 ; 48.6,-36.5 49.3,-36.5 48.6,-36.5 ; 52.4,-36.5 53.1,-36.5 52.4,-36.5 ; 56.2,-36.5 56.9,-36.5 56.2,-36.5 ; 63.8,-36.5 64.5,-36.5 63.8,-36.5 ; 67.6,-36.5 68.3,-36.5 67.6,-36.5 ; 71.4,-36.5 72.1,-36.5 71.4,-36.5 ; 75.2,-36.5 75.9,-36.5 75.2,-36.5 ; 79,-36.5 79.7,-36.5 79,-36.5 ; 82.8,-36.5 83.5,-36.5 82.8,-36.5 ; 86.6,-36.5 87.3,-36.5 86.6,-36.5
Y18: TCN.U.2.D6 | length 303.2
  Inner 1 w0.15: v2(87.65,0.15) 87.65,-0.875 89.95,-3.175 89.95,-27.704 89.575,-28.079 89.575,-31.525 v3(88.4,-32.7)
  Bottom Layer w0.15: v4(11.6,5.85) 11.925,5.525 11.925,1.325 14.55,-1.3 19.425,-1.3 22.972,2.247 24.128,2.247 26.262,0.113 34.112,0.113 34.412,-0.187 48.637,-0.187 49.273,-0.823 64.673,-0.823 65.2,-1.35 85.675,-1.35 87.175,0.15 v2(87.65,0.15)
  Bottom Layer w0.2: -66.65,-32.7 v3(88.4,-32.7) ; -65.4,-32.7 -64.7,-32.7 ; -61.6,-32.7 -60.9,-32.7 ; -57.8,-32.7 -57.1,-32.7 ; -54,-32.7 -53.3,-32.7 ; -50.2,-32.7 -49.5,-32.7 ; -46.4,-32.7 -45.7,-32.7 ; -42.6,-32.7 -41.9,-32.7 ; -38.8,-32.7 -38.1,-32.7 ; -35,-32.7 -34.3,-32.7 ; -31.2,-32.7 -30.5,-32.7 ; -27.4,-32.7 -26.7,-32.7 ; -23.6,-32.7 -22.9,-32.7 ; -19.8,-32.7 -19.1,-32.7 ; -16,-32.7 -15.3,-32.7 ; -12.2,-32.7 -11.5,-32.7 ; -8.4,-32.7 -7.7,-32.7 ; -4.6,-32.7 -3.9,-32.7 ; -0.8,-32.7 -0.1,-32.7 ; 3,-32.7 3.7,-32.7 ; 6.8,-32.7 7.5,-32.7 ; 10.6,-32.7 11.3,-32.7 ; 14.4,-32.7 15.1,-32.7 ; 18.2,-32.7 18.9,-32.7 ; 22,-32.7 22.7,-32.7 ; 25.8,-32.7 26.5,-32.7 ; 29.6,-32.7 30.3,-32.7 ; 33.4,-32.7 34.1,-32.7 ; 37.2,-32.7 37.9,-32.7 ; 41,-32.7 41.7,-32.7 ; 44.8,-32.7 45.5,-32.7 ; 48.6,-32.7 49.3,-32.7 ; 52.4,-32.7 53.1,-32.7 ; 56.2,-32.7 56.9,-32.7 ; 60,-32.7 60.7,-32.7 ; 63.8,-32.7 64.5,-32.7 ; 67.6,-32.7 68.3,-32.7 ; 71.4,-32.7 72.1,-32.7 ; 75.2,-32.7 75.9,-32.7 ; 79,-32.7 79.7,-32.7 ; 82.8,-32.7 83.5,-32.7 ; 86.6,-32.7 87.3,-32.7
Y19: TCN.U.2.A5 | length 294.9
  Inner 3 w0.15: v4(12.25,3.9) 12.25,2.075 15,-0.675 19.05,-0.675 22.68,2.955 24.42,2.955 26.555,0.82 34.405,0.82 34.705,0.52 48.93,0.52 49.566,-0.116 64.966,-0.116 65.493,-0.643 85.157,-0.643 85.75,-0.05 v2(85.75,-0.025)
  Inner 1 w0.15: v2(85.75,-0.025) 86.1,-0.375 87.3,-1.575 87.975,-1.575 89.7,-3.3 89.7,-27.6 v3(88.4,-28.9)
  Bottom Layer w0.2: -66.65,-28.9 v3(88.4,-28.9) ; -65.4,-28.9 -64.7,-28.9 ; -61.6,-28.9 -60.9,-28.9 ; -57.8,-28.9 -57.1,-28.9 ; -54,-28.9 -53.3,-28.9 ; -50.2,-28.9 -49.5,-28.9 ; -46.4,-28.9 -45.7,-28.9 ; -42.6,-28.9 -41.9,-28.9 ; -38.8,-28.9 -38.1,-28.9 ; -35,-28.9 -34.3,-28.9 ; -31.2,-28.9 -30.5,-28.9 ; -27.4,-28.9 -26.7,-28.9 ; -23.6,-28.9 -22.9,-28.9 ; -19.8,-28.9 -19.1,-28.9 ; -16,-28.9 -15.3,-28.9 ; -12.2,-28.9 -11.5,-28.9 ; -8.4,-28.9 -7.7,-28.9 ; -4.6,-28.9 -3.9,-28.9 ; -0.8,-28.9 -0.1,-28.9 ; 3,-28.9 3.7,-28.9 ; 6.8,-28.9 7.5,-28.9 ; 10.6,-28.9 11.3,-28.9 ; 14.4,-28.9 15.1,-28.9 ; 18.2,-28.9 18.9,-28.9 ; 22,-28.9 22.7,-28.9 ; 25.8,-28.9 26.5,-28.9 ; 29.6,-28.9 30.3,-28.9 ; 33.4,-28.9 34.1,-28.9 ; 37.2,-28.9 37.9,-28.9 ; 41,-28.9 41.7,-28.9 ; 44.8,-28.9 45.5,-28.9 ; 48.6,-28.9 49.3,-28.9 ; 52.4,-28.9 53.1,-28.9 ; 56.2,-28.9 56.9,-28.9 ; 60,-28.9 60.7,-28.9 ; 63.8,-28.9 64.5,-28.9 ; 67.6,-28.9 68.3,-28.9 ; 71.4,-28.9 72.1,-28.9 ; 75.2,-28.9 75.9,-28.9 ; 79,-28.9 79.7,-28.9 ; 82.8,-28.9 83.5,-28.9 ; 86.6,-28.9 87.3,-28.9
Y20: TCN.U.2.B5 | length 323.9
  Top Layer w0.15: v3(88.4,-25.1) 89.575,-23.925 89.575,-20.464 89.815,-20.224 89.815,-16.764 90.055,-16.524 90.055,-13.063 90.295,-12.823 90.295,-9.363 90.535,-9.123 90.535,-5.662 90.775,-5.422 90.775,-2.2 90.45,-1.875 v2(90.45,-0.375)
  Inner 3 w0.15: v4(12.25,4.55) 11.925,4.225 11.925,2.025 14.875,-0.925 19.175,-0.925 22.789,2.689 24.311,2.689 26.445,0.555 34.295,0.555 34.595,0.255 48.82,0.255 49.456,-0.381 64.856,-0.381 65.383,-0.908 89.392,-0.908 89.925,-0.375 v2(90.45,-0.375)
  Bottom Layer w0.2: -66.65,-25.1 v3(88.4,-25.1) ; 26.5,-25.1 25.8,-25.1 26.5,-25.1 ; -65.4,-25.1 -64.7,-25.1 -65.4,-25.1 ; -61.6,-25.1 -60.9,-25.1 -61.6,-25.1 ; -57.8,-25.1 -57.1,-25.1 -57.8,-25.1 ; -54,-25.1 -53.3,-25.1 -54,-25.1 ; -50.2,-25.1 -49.5,-25.1 -50.2,-25.1 ; -46.4,-25.1 -45.7,-25.1 -46.4,-25.1 ; -42.6,-25.1 -41.9,-25.1 -42.6,-25.1 ; -38.8,-25.1 -38.1,-25.1 -38.8,-25.1 ; -35,-25.1 -34.3,-25.1 -35,-25.1 ; -31.2,-25.1 -30.5,-25.1 -31.2,-25.1 ; -27.4,-25.1 -26.7,-25.1 -27.4,-25.1 ; -23.6,-25.1 -22.9,-25.1 -23.6,-25.1 ; -19.8,-25.1 -19.1,-25.1 -19.8,-25.1 ; -16,-25.1 -15.3,-25.1 -16,-25.1 ; -12.2,-25.1 -11.5,-25.1 -12.2,-25.1 ; -8.4,-25.1 -7.7,-25.1 -8.4,-25.1 ; -4.6,-25.1 -3.9,-25.1 -4.6,-25.1 ; -0.8,-25.1 -0.1,-25.1 -0.8,-25.1 ; 3,-25.1 3.7,-25.1 3,-25.1 ; 6.8,-25.1 7.5,-25.1 6.8,-25.1 ; 10.6,-25.1 11.3,-25.1 10.6,-25.1 ; 14.4,-25.1 15.1,-25.1 14.4,-25.1 ; 18.2,-25.1 18.9,-25.1 18.2,-25.1 ; 22,-25.1 22.7,-25.1 22,-25.1 ; 29.6,-25.1 30.3,-25.1 29.6,-25.1 ; 33.4,-25.1 34.1,-25.1 33.4,-25.1 ; 37.2,-25.1 37.9,-25.1 37.2,-25.1 ; 41,-25.1 41.7,-25.1 41,-25.1 ; 44.8,-25.1 45.5,-25.1 44.8,-25.1 ; 48.6,-25.1 49.3,-25.1 48.6,-25.1 ; 52.4,-25.1 53.1,-25.1 52.4,-25.1 ; 56.2,-25.1 56.9,-25.1 56.2,-25.1 ; 60,-25.1 60.7,-25.1 60,-25.1 ; 63.8,-25.1 64.5,-25.1 63.8,-25.1 ; 67.6,-25.1 68.3,-25.1 67.6,-25.1 ; 71.4,-25.1 72.1,-25.1 71.4,-25.1 ; 75.2,-25.1 75.9,-25.1 75.2,-25.1 ; 79,-25.1 79.7,-25.1 79,-25.1 ; 82.8,-25.1 83.5,-25.1 82.8,-25.1 ; 86.6,-25.1 87.3,-25.1 86.6,-25.1
Y21: TCN.U.2.C5 | length 291.3
  Top Layer w0.15: v3(88.4,-21.3) 89.575,-20.125 89.575,-16.664 89.815,-16.424 89.815,-12.964 90.055,-12.724 90.055,-9.263 90.295,-9.023 90.295,-5.563 90.535,-5.323 90.535,-2.335 90.2,-2 90.2,-1 89.725,-0.525 v2(89.2,-0.525)
  Inner 4 w0.15: v4(12.25,5.2) 12.575,4.875 12.575,1.25 14.625,-0.8 19.425,-0.8 22.826,2.601 24.274,2.601 26.408,0.467 34.258,0.467 34.558,0.167 48.783,0.167 49.42,-0.47 64.82,-0.47 65.346,-0.996 87.129,-0.996 88,-0.125 88.8,-0.125 v2(89.2,-0.525)
  Bottom Layer w0.2: -66.65,-21.3 v3(88.4,-21.3) ; -65.4,-21.3 -64.7,-21.3 ; -61.6,-21.3 -60.9,-21.3 ; -57.8,-21.3 -57.1,-21.3 ; -54,-21.3 -53.3,-21.3 ; -50.2,-21.3 -49.5,-21.3 ; -46.4,-21.3 -45.7,-21.3 ; -42.6,-21.3 -41.9,-21.3 ; -38.8,-21.3 -38.1,-21.3 ; -35,-21.3 -34.3,-21.3 ; -31.2,-21.3 -30.5,-21.3 ; -27.4,-21.3 -26.7,-21.3 ; -23.6,-21.3 -22.9,-21.3 ; -19.8,-21.3 -19.1,-21.3 ; -16,-21.3 -15.3,-21.3 ; -12.2,-21.3 -11.5,-21.3 ; -8.4,-21.3 -7.7,-21.3 ; -4.6,-21.3 -3.9,-21.3 ; -0.8,-21.3 -0.1,-21.3 ; 3,-21.3 3.7,-21.3 ; 6.8,-21.3 7.5,-21.3 ; 10.6,-21.3 11.3,-21.3 ; 14.4,-21.3 15.1,-21.3 ; 18.2,-21.3 18.9,-21.3 ; 22,-21.3 22.7,-21.3 ; 25.8,-21.3 26.5,-21.3 ; 29.6,-21.3 30.3,-21.3 ; 33.4,-21.3 34.1,-21.3 ; 37.2,-21.3 37.9,-21.3 ; 41,-21.3 41.7,-21.3 ; 44.8,-21.3 45.5,-21.3 ; 48.6,-21.3 49.3,-21.3 ; 52.4,-21.3 53.1,-21.3 ; 56.2,-21.3 56.9,-21.3 ; 60,-21.3 60.7,-21.3 ; 63.8,-21.3 64.5,-21.3 ; 67.6,-21.3 68.3,-21.3 ; 71.4,-21.3 72.1,-21.3 ; 75.2,-21.3 75.9,-21.3 ; 79,-21.3 79.7,-21.3 ; 82.8,-21.3 83.5,-21.3 ; 86.6,-21.3 87.3,-21.3
Y22: TCN.U.2.D5 | length 288.5
  Top Layer w0.15: v3(88.4,-17.5) 89.575,-16.325 89.575,-12.864 89.815,-12.624 89.815,-9.164 90.055,-8.924 90.055,-5.463 90.295,-5.223 90.295,-2.995 88.525,-1.225 88.525,0.15 v2(88.425,0.25)
  Bottom Layer w0.15: v4(12.25,5.85) 12.575,5.525 12.575,1.025 14.65,-1.05 19.325,-1.05 22.87,2.495 24.23,2.495 26.364,0.361 34.214,0.361 34.514,0.061 48.739,0.061 49.376,-0.576 64.776,-0.576 65.303,-1.103 85.572,-1.103 87.2,0.525 88.15,0.525 v2(88.425,0.25)
  Bottom Layer w0.2: -66.65,-17.5 v3(88.4,-17.5) ; -65.4,-17.5 -64.7,-17.5 ; -61.6,-17.5 -60.9,-17.5 ; -57.8,-17.5 -57.1,-17.5 ; -54,-17.5 -53.3,-17.5 ; -50.2,-17.5 -49.5,-17.5 ; -46.4,-17.5 -45.7,-17.5 ; -42.6,-17.5 -41.9,-17.5 ; -38.8,-17.5 -38.1,-17.5 ; -35,-17.5 -34.3,-17.5 ; -31.2,-17.5 -30.5,-17.5 ; -27.4,-17.5 -26.7,-17.5 ; -23.6,-17.5 -22.9,-17.5 ; -19.8,-17.5 -19.1,-17.5 ; -16,-17.5 -15.3,-17.5 ; -12.2,-17.5 -11.5,-17.5 ; -8.4,-17.5 -7.7,-17.5 ; -4.6,-17.5 -3.9,-17.5 ; -0.8,-17.5 -0.1,-17.5 ; 3,-17.5 3.7,-17.5 ; 6.8,-17.5 7.5,-17.5 ; 10.6,-17.5 11.3,-17.5 ; 14.4,-17.5 15.1,-17.5 ; 18.2,-17.5 18.9,-17.5 ; 22,-17.5 22.7,-17.5 ; 25.8,-17.5 26.5,-17.5 ; 29.6,-17.5 30.3,-17.5 ; 33.4,-17.5 34.1,-17.5 ; 37.2,-17.5 37.9,-17.5 ; 41,-17.5 41.7,-17.5 ; 44.8,-17.5 45.5,-17.5 ; 48.6,-17.5 49.3,-17.5 ; 52.4,-17.5 53.1,-17.5 ; 56.2,-17.5 56.9,-17.5 ; 60,-17.5 60.7,-17.5 ; 63.8,-17.5 64.5,-17.5 ; 67.6,-17.5 68.3,-17.5 ; 71.4,-17.5 72.1,-17.5 ; 75.2,-17.5 75.9,-17.5 ; 79,-17.5 79.7,-17.5 ; 82.8,-17.5 83.5,-17.5 ; 86.6,-17.5 87.3,-17.5
Y23: TCN.U.2.A4 | length 280.9
  Top Layer w0.15: v2(86.45,0.35) 86.75,0.35 87.475,-0.375 87.475,-0.55 89.6,-2.675 90.055,-3.13 90.055,-5.124 89.815,-5.364 89.815,-8.824 89.575,-9.064 89.575,-12.525 v3(88.4,-13.7)
  Bottom Layer w0.15: v4(12.9,3.9) 12.9,1.075 14.775,-0.8 19.225,-0.8 22.767,2.742 24.333,2.742 26.467,0.608 34.317,0.608 34.617,0.308 48.842,0.308 49.478,-0.328 64.878,-0.328 65.405,-0.855 85.445,-0.855 86.45,0.15 v2(86.45,0.35)
  Bottom Layer w0.2: -66.65,-13.7 v3(88.4,-13.7) ; -65.4,-13.7 -64.7,-13.7 ; -61.6,-13.7 -60.9,-13.7 ; -57.8,-13.7 -57.1,-13.7 ; -54,-13.7 -53.3,-13.7 ; -50.2,-13.7 -49.5,-13.7 ; -46.4,-13.7 -45.7,-13.7 ; -42.6,-13.7 -41.9,-13.7 ; -38.8,-13.7 -38.1,-13.7 ; -35,-13.7 -34.3,-13.7 ; -31.2,-13.7 -30.5,-13.7 ; -27.4,-13.7 -26.7,-13.7 ; -23.6,-13.7 -22.9,-13.7 ; -19.8,-13.7 -19.1,-13.7 ; -16,-13.7 -15.3,-13.7 ; -12.2,-13.7 -11.5,-13.7 ; -8.4,-13.7 -7.7,-13.7 ; -4.6,-13.7 -3.9,-13.7 ; -0.8,-13.7 -0.1,-13.7 ; 3,-13.7 3.7,-13.7 ; 6.8,-13.7 7.5,-13.7 ; 10.6,-13.7 11.3,-13.7 ; 14.4,-13.7 15.1,-13.7 ; 18.2,-13.7 18.9,-13.7 ; 22,-13.7 22.7,-13.7 ; 25.8,-13.7 26.5,-13.7 ; 29.6,-13.7 30.3,-13.7 ; 33.4,-13.7 34.1,-13.7 ; 37.2,-13.7 37.9,-13.7 ; 41,-13.7 41.7,-13.7 ; 44.8,-13.7 45.5,-13.7 ; 48.6,-13.7 49.3,-13.7 ; 52.4,-13.7 53.1,-13.7 ; 56.2,-13.7 56.9,-13.7 ; 60,-13.7 60.7,-13.7 ; 63.8,-13.7 64.5,-13.7 ; 67.6,-13.7 68.3,-13.7 ; 71.4,-13.7 72.1,-13.7 ; 75.2,-13.7 75.9,-13.7 ; 79,-13.7 79.7,-13.7 ; 82.8,-13.7 83.5,-13.7 ; 86.6,-13.7 87.3,-13.7
Y24: TCN.U.2.B4 | length 276.1
  Top Layer w0.15: v2(87.05,-0.5) 87.075,-0.5 89.815,-3.24 89.815,-5.024 89.575,-5.264 89.575,-8.725 v3(88.4,-9.9)
  Inner 4 w0.15: v4(12.9,4.55) 13.225,4.225 13.225,0.975 14.75,-0.55 19.3,-0.55 22.716,2.866 24.384,2.866 26.518,0.732 34.368,0.732 34.668,0.432 48.893,0.432 49.529,-0.204 64.93,-0.204 65.456,-0.731 86.819,-0.731 v2(87.05,-0.5)
  Bottom Layer w0.2: -66.65,-9.9 v3(88.4,-9.9) ; -65.4,-9.9 -64.7,-9.9 ; -61.6,-9.9 -60.9,-9.9 ; -57.8,-9.9 -57.1,-9.9 ; -54,-9.9 -53.3,-9.9 ; -50.2,-9.9 -49.5,-9.9 ; -46.4,-9.9 -45.7,-9.9 ; -42.6,-9.9 -41.9,-9.9 ; -38.8,-9.9 -38.1,-9.9 ; -35,-9.9 -34.3,-9.9 ; -31.2,-9.9 -30.5,-9.9 ; -27.4,-9.9 -26.7,-9.9 ; -23.6,-9.9 -22.9,-9.9 ; -19.8,-9.9 -19.1,-9.9 ; -16,-9.9 -15.3,-9.9 ; -12.2,-9.9 -11.5,-9.9 ; -8.4,-9.9 -7.7,-9.9 ; -4.6,-9.9 -3.9,-9.9 ; -0.8,-9.9 -0.1,-9.9 ; 3,-9.9 3.7,-9.9 ; 6.8,-9.9 7.5,-9.9 ; 10.6,-9.9 11.3,-9.9 ; 14.4,-9.9 15.1,-9.9 ; 18.2,-9.9 18.9,-9.9 ; 22,-9.9 22.7,-9.9 ; 25.8,-9.9 26.5,-9.9 ; 29.6,-9.9 30.3,-9.9 ; 33.4,-9.9 34.1,-9.9 ; 37.2,-9.9 37.9,-9.9 ; 41,-9.9 41.7,-9.9 ; 44.8,-9.9 45.5,-9.9 ; 48.6,-9.9 49.3,-9.9 ; 52.4,-9.9 53.1,-9.9 ; 56.2,-9.9 56.9,-9.9 ; 60,-9.9 60.7,-9.9 ; 63.8,-9.9 64.5,-9.9 ; 67.6,-9.9 68.3,-9.9 ; 71.4,-9.9 72.1,-9.9 ; 75.2,-9.9 75.9,-9.9 ; 79,-9.9 79.7,-9.9 ; 82.8,-9.9 83.5,-9.9 ; 86.6,-9.9 87.3,-9.9
Y25: TCN.U.2.C4 | length 244
  Top Layer w0.15: v2(84.95,-0.225) 84.95,-0.35 86.175,-1.575 87.8,-1.575 89.575,-3.35 89.575,-4.925 v3(88.4,-6.1)
  Bottom Layer w0.15: v4(12.9,5.2) 13.225,4.875 13.225,1.1 14.875,-0.55 19.125,-0.55 22.665,2.99 24.435,2.99 26.569,0.856 34.419,0.856 34.719,0.556 48.944,0.556 49.581,-0.081 64.981,-0.081 65.508,-0.608 84.567,-0.608 v2(84.95,-0.225)
  Bottom Layer w0.2: -66.65,-6.1 v3(88.4,-6.1)
pads on no net: MCH.FID.1.1 MCH.FID.2.1 TCN.U.2.F5 TCN.U.2.F10 TCN.U.2.G6 TCN.U.2.G9 TCN.U.2.G10 TCN.U.2.G11 TCN.U.2.H9 TCN.U.2.H10 TCN.U.2.H11 TCN.U.2.J9 TCN.U.2.J10 TCN.U.2.J11 USB.J.3. USB.J.3.4 USB.J.3.10 USB.Z.1.6

## Polygon pours and split planes (outlines as drawn)
GND on Top Layer "GND_L01_P018" (solid, remove dead copper, pour order 18): 96,19 -18.5,19 -4,5 3.5,5 6,7.5 6,8 7,9 9.5,9 11,7.5 12.9,7.5 12.9,7.9 14,9 16,9 17,8 20,5 25.5,5 27.5,3 39,3 39.5,2.5 50.5,2.5 51,2 67,2 67.5,1.5 82.5,1.5 83.5,2.5 91.5,2.5 94,0 94,-106 96,-106
GND on Top Layer "GND_L01_P024" (solid, remove dead copper, pour order 24): -3,14 -74,14 -74,-106 -70,-106 -70,-98 -71,-97 -71,-1 -65,5 -58,5 -56,3 -51,3 -50,4 -11,4 -10,5 -3,5
3V3 on Top Layer "3V3_L01_P000" (solid, remove dead copper, pour order 0): 32.125,15.45 31.85,15.175 31.85,11.8 32.15,11.5 34.65,11.5 35.05,11.9 35.05,13.25 33.45,14.85 33.45,15.15 33.15,15.45
3V3 on Top Layer "3V3_L01_P001" (solid, remove dead copper, pour order 1): 49,14 cw(c49,13.517) 49.341,13.859 49.7,13.5 ccw(c50.424,14.224) 50.424,13.2 51.159,13.2 ccw(c51.159,13.541) 51.4,13.3 ccw(c50.917,13.783) 51.6,13.783 51.6,16.317 ccw(c50.917,16.317) 51.4,16.8 ccw(c50.676,16.076) 50.676,17.1 49.524,17.1 ccw(c49.524,16.076) 48.8,16.8 ccw(c49.766,15.834) 48.4,15.834 48.4,14.441 ccw(c48.741,14.441) 48.5,14.2 48.559,14.141 ccw(c48.9,14.483) 48.9,14
GND on Inner 3 "GND_L04_P020" (solid, remove dead copper, pour order 20): 96,19 -18.5,19 -4,5 3.5,5 6,7.5 6,8 7,9 15,9 16,8 17,8 20,5 25.5,5 27.5,3 39,3 39.5,2.5 50.5,2.5 51,2 67,2 67.5,1.5 82.5,1.5 83.5,2.5 91.5,2.5 96,2.5
3V3 on Inner 3 "3V3_L04_P003" (solid, remove dead copper, pour order 3): 14,1.7 14.3,2 14.3,4.8 16.3,6.8 17.2,6.8 18.65,6.8 19,7.15 19,9.875 15.575,13.3 11.625,13.3 7.6,9.275 7.6,7.7 6.4,6.5 5.6,6.5 3.1,6.5 2.9,6.3 2.9,5.6 3.1,5.4 6.575,5.4 7.6,4.375 7.6,0.1 7.9,-0.2 8.7,-0.2 8.8,-0.1 8.8,1.9 8.8,4.413 9.787,5.4 12.1,5.4 13.2,4.3 13.2,1.9 13.4,1.7
3V3 on Inner 3 "3V3_L04_P014" (solid, remove dead copper, pour order 14): 60,16 58,18 19.75,18 18,16.25 12.6,10.85 12.6,9.87 15.47,7 45.125,7 47.95,4.175 59.225,4.175 60,4.95
GND on Inner 2 "GND_L03_P015" (solid, remove dead copper, pour order 15): 96,19 -3,19 -3,5 5.6,5 6.6,4 8.5,4 14.475,4 15.3,4.825 15.3,5.95 16.15,6.8 18.2,6.8 20,5 25.5,5 27.5,3 39,3 39.5,2.5 50.5,2.5 51,2 67,2 67.5,1.5 82.5,1.5 83.5,2.5 96,2.5
GND on Inner 2 "GND_L03_P017" (solid, remove dead copper, pour order 17): 90.997,3.003 94,0 94,-37 93,-38 93,-52 92,-53 92,-106 96,-106 96,2.988
GND on Inner 2 "GND_L03_P016" (solid, remove dead copper, pour order 16): -3,14 -74,14 -74,-106 -70,-106 -70,-98 -71,-97 -71,-1 -65,5 -58,5 -56,3 -51,3 -50,4 -11,4 -10,5 -3,5
DrivenShield on Inner 2 "DRIVENSHIELD_L03_P013" (hatched 90Degree grid 0.6 track 0.15, remove dead copper, pour order 13): 0.988,1.938 5.175,-2.25 6.45,-2.25 8,-2.25 8,-0.625 6.15,-0.625 2.288,3.237
DrivenShield on Inner 2 "DRIVENSHIELD_L03_P012" (hatched 90Degree grid 0.6 track 0.15, remove dead copper, pour order 12): 21.7,2.8 18.95,0.05 20.4,-1.4 23.15,1.35
GND on Bottom Layer "GND_L06_P022" (solid, remove dead copper, pour order 22): 96,19 -18.5,19 -4,5 3.5,5 6,7.5 6,8 7,9 15,9 16,8 17,8 20,5 25.5,5 27.5,3 39,3 39.5,2.5 50.5,2.5 51,2 67,2 67.5,1.5 82.5,1.5 83.5,2.5 91.5,2.5 94,0 94,-106 96,-106
GND on Bottom Layer "GND_L06_P023" (solid, remove dead copper, pour order 23): -3,14 -74,14 -74,-106 -70,-106 -70,-98 -71,-97 -71,-1 -65,5 -58,5 -56,3 -51,3 -50,4 -11,4 -10,5 -3,5
GND on Inner 1 "GND_L02_P019" (solid, remove dead copper, pour order 19): 96,19 -18.5,19 -4,5 3.5,5 6,7.5 6,8 7,9 15,9 16,8 17,8 20,5 25.5,5 27.5,3 39,3 39.5,2.5 50.5,2.5 51,2 67,2 67.5,1.5 82.5,1.5 83.5,2.5 91.5,2.5 96,2.5
GND on Inner 4 "GND_L05_P021" (solid, remove dead copper, pour order 21): 96,19 -18.5,19 -4,5 3.5,5 6,7.5 6,8 7,9 15,9 16,8 17,8 20,5 25.5,5 27.5,3 39,3 39.5,2.5 50.5,2.5 51,2 67,2 67.5,1.5 82.5,1.5 83.5,2.5 91.5,2.5 96,2.5

## Keep-outs
Keep-Out Layer:
  region: -45.7,12.9 cw(c-45.7,14) -46.8,14 -37,14 cw(c-38.1,14) -38.1,12.9
  region: 60.1,17.9 cw(c60.1,19) 59,19 68.8,19 cw(c67.7,19) 67.7,17.9

## Other copper
Bottom Layer:
  drawing of 2199 lines, arcs and shapes, not listed

## Silkscreen, mask and mechanical layers (free items; w line width, h text height)
Top Overlay:
  circle w0.5: c76.75,8.6 r0.15
  rectangle: 61,4.7 69.7,5
  rectangle: 40.325,6.35 46.215,7.05
  lines w0.5: 83,7 83,18
  text "Haptics  / Motor" at 86.5,11 h2 r315
  text "CLK  IO  GND" at 61,7.9 h1.52
  text "Trackpad R2.002 / October 2024" at -47.775,6.075 h3
  text "Licensed under the / CERN-OHL-S v2 / Copyright Ploopy 2024" at -26,6 h2
  text "SWD" at 61,5 h1.52
  text "BOOT" at 40.33,2.075 h2
  text "Origin" at -11,-0.185 h4
Board Outline:
  the board outline again, w0.2

## Text inside footprints (layer, text, board x,y; h text height)
MCH.LOGO.2: Top Overlay "X" at 3,0.6 h2.4; Top Overlay "Y" at 0.599,3.1 h2.4